# Altium PCB motor_drive.PcbDoc
Units mil, origin at the board's own origin, x right, y up, seen from the top; angles counter-clockwise.
Board outline 4650.03 x 1220.03 mil, 2 copper layers (Top Layer, Bottom Layer); 28 components, 34 nets, 102 pads, 92 vias.
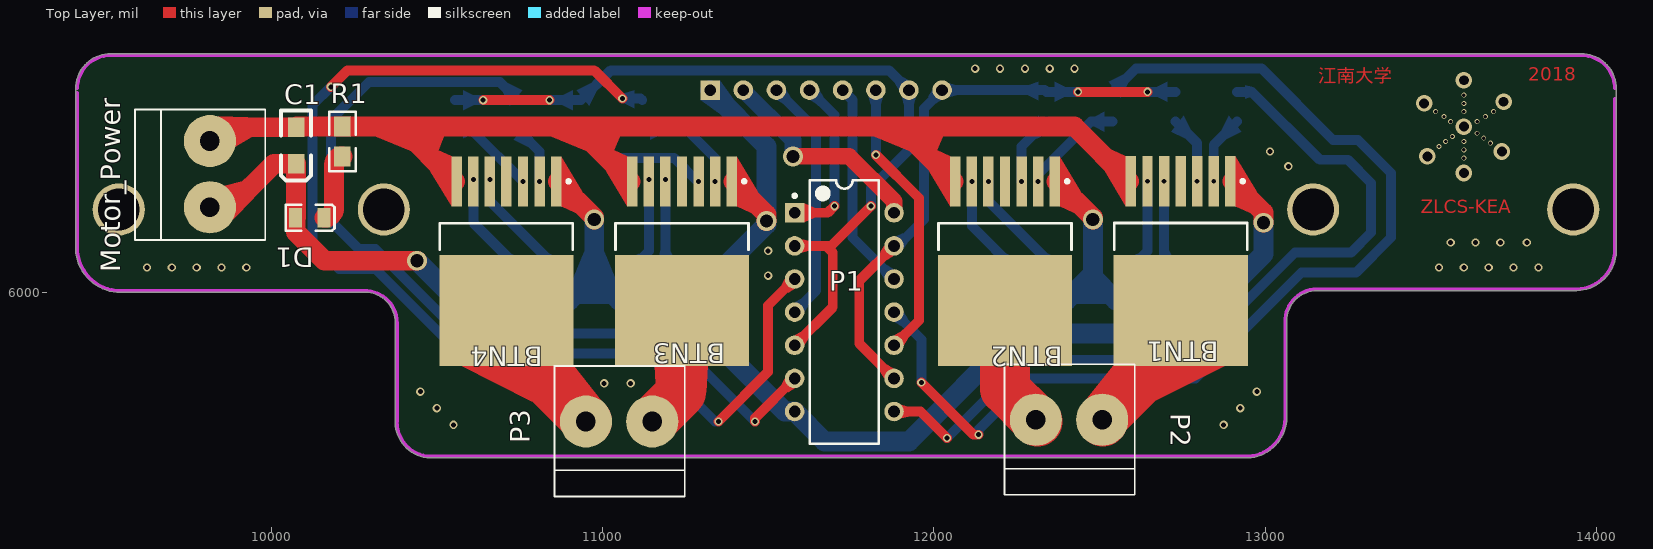
[diagram p0: Top Layer view]
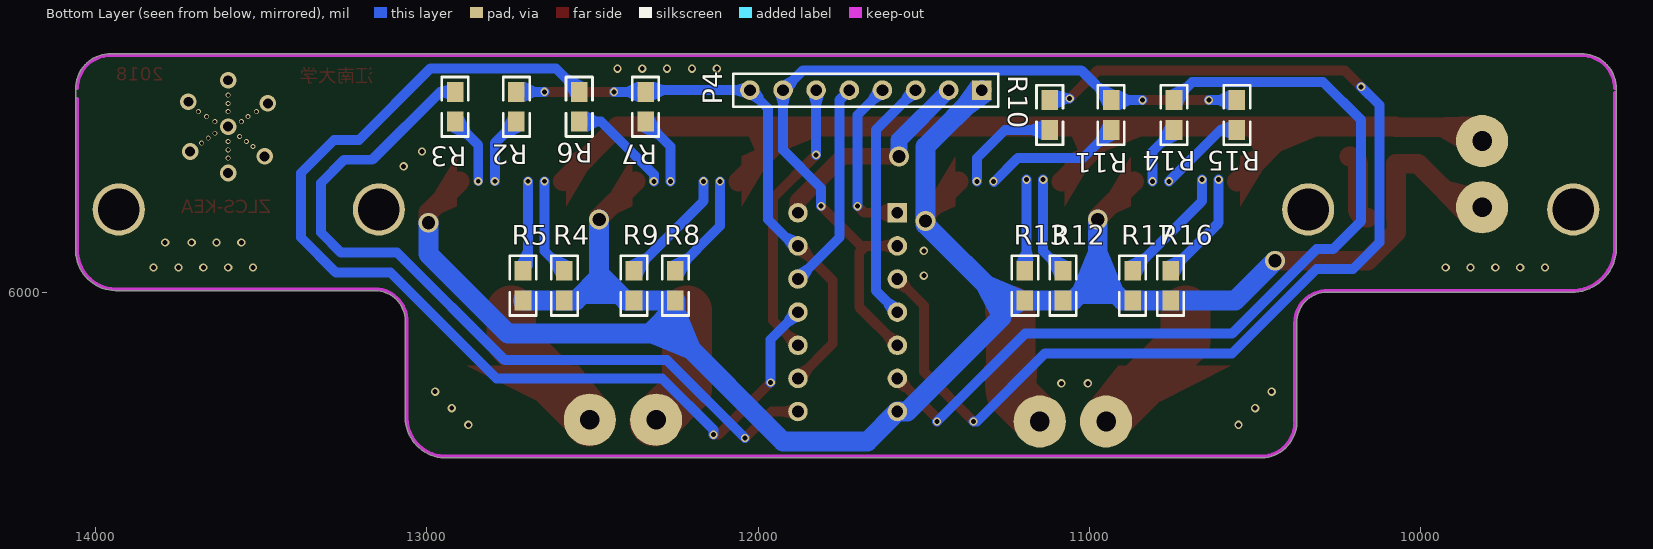
[diagram p1: Bottom Layer view, seen from below]

## Layer stack, top to bottom
Top Solder: solder mask 0.4, Solder Resist, Dk 3.5
Top Layer: signal copper 1.4
Dielectric 1: dielectric 12.6, FR-4, Dk 4.8
Bottom Layer: signal copper 1.4
Bottom Solder: solder mask 0.4, Solder Resist, Dk 3.5

## Board outline
10374.99,5625.35 10374.99,5909.93 ccw(c10282.5,5907.5) 10284.94,5999.98 9555.18,5999.98 cw(c9545,6135) 9534.7,5999.99 cw(c9545,6135) 9534.53,6000.01 cw(c9545,6135) 9410.76,6117.32 cw(c9415,6120) 9409.99,6120 9409.99,6615 cw(c9515,6615) 9515,6720.02 13955,6720.02 cw(c13955,6615) 14060.01,6615 14060.01,6115 cw(c14055,6115) 14059.33,6112.47 cw(c13937.5,6127.5) 13929.84,6004.98 13155.06,6004.98 cw(c13157.5,5912.5) 13155.13,6004.99 13155.06,6004.98 ccw(c13157.5,5912.5) 13065.01,5914.92 13065.01,5630.16 cw(c12942.5,5622.5) 13065.25,5622.5 cw(c12942.5,5622.5) 12957.53,5500.67 cw(c12955,5505) 12955,5499.98 10470,5499.98 cw(c10470,5505) 10469.25,5500.04 cw(c10485,5610)

## Design rules (kind name [scope] priority, off if disabled: settings)
Clearance [All] p1: gap=10 ignorepadtopadclearanceinfootprint=FALSE except(0: Arc-Hole Track-Hole SMDPad-Hole THPad-Hole Via-Hole Fill-Hole Poly-Hole Region-Hole Text-Hole)
PolygonConnect [All] p1: connectstyle=Relief reliefconductorwidth=10 reliefentries=4 polygonreliefangle="90 Angle" airgapwidth=10
RoutingVias [All] p1: holewidth=28 width=50 viastyle="Through Hole" minholewidth=28 minwidth=50 maxholewidth=28 maxwidth=50
SolderMaskExpansion [All] p1: expansion=4
Width Width_7 [InNet('NetD1_1')] p1: maxlimit=100 minlimit=10 preferedwidth=60
Width Width_6 [InNet('NetBTN4_8')] p2: maxlimit=300 minlimit=10 preferedwidth=150
Width Width_5 [InNet('NetBTN3_8')] p3: maxlimit=300 minlimit=10 preferedwidth=150
Width Width_4 [InNet('NetBTN2_8')] p4: maxlimit=300 minlimit=10 preferedwidth=150
Width Width_8 [InNet('NetBTN1_8')] p5: maxlimit=300 minlimit=10 preferedwidth=150
Width Width_3 [InNet('5V-SEN')] p6: maxlimit=60 minlimit=10 preferedwidth=50
Width Width_2 [InNet('VCC-7.2V')] p7: maxlimit=60 minlimit=10 preferedwidth=60
Width Width_1 [InNet('GND')] p8: maxlimit=60 minlimit=10 preferedwidth=60
Width [All] p9: maxlimit=60 minlimit=10 preferedwidth=30
30 further rules are at their usual default settings.

## Components (designator, comment, footprint, x,y, rotation, side; value= is the part's Value field where it differs from the comment)
BTN1 "BTN7971B" TO-263-7 12745,6095 r270 top
BTN2 "BTN7971B" TO-263-7 12215,6094.61 r270 top
BTN3 "BTN7971B" TO-263-7 11240,6094.61 r270 top
BTN4 "BTN7971B" TO-263-7 10710,6094.61 r270 top
C1 "Cap" 3216 10075,6498 r270 top value=0.47uF
D1 "LED3" C-0805 10160,6225 r180 top
Motor_Power "供电接口" P_Header 9815,6356.54 r90 top
P1 "74LS08" DIP-14 11730,5940 r0 top
P2 "Header 2" P_Header 12408.15,5615 r180 top
P3 "Header 2" P_Header 11050,5610 r180 top
P4 "Header 8" HDR1X8 11325,6610 r0 bottom
R1 "Res2" 0805 10215,6410 r90 top value=2K
R2 "Res2" 0805 12730,6605 r270 bottom value=10K
R3 "Res2" 0805 12915,6605 r270 bottom value=10K
R4 "Res2" 0805 12585,5975 r90 bottom value=1K
R5 "Res2" 0805 12710,5975 r90 bottom value=1K
R6 "Res2" 0805 12540,6605 r270 bottom value=10K
R7 "Res2" 0805 12340,6605 r270 bottom value=10K
R8 "Res2" 0805 12250,5975 r90 bottom value=1K
R9 "Res2" 0805 12375,5975 r90 bottom value=1K
R10 "Res2" 0805 11120,6580 r270 bottom value=10K
R11 "Res2" 0805 10935,6580 r270 bottom value=10K
R12 "Res2" 0805 11080,5975 r90 bottom value=1K
R13 "Res2" 0805 11195,5975 r90 bottom value=1K
R14 "Res2" 0805 10745,6580 r270 bottom value=10K
R15 "Res2" 0805 10555,6580 r270 bottom value=10K
R16 "Res2" 0805 10755,5975 r90 bottom value=1K
R17 "Res2" 0805 10870,5975 r90 bottom value=1K

## Footprints (in the part's own frame and the unit in brackets; to place one, negate y for a bottom-side part, rotate by r counter-clockwise, add the part's x,y. Pads: shape width x height; smd on the part's side, far side on the other; paste and mask are expansions set on the pad)
0805 [mil]
  rect 60x50 smd: 1(0,0) 2(90,0)
  silkscreen extent -45,-40 135,40
3216 [mil]
  rect 60x50 smd: 1(110,0) 2(0,0)
  silkscreen extent -50,-45 160,45
C-0805 [mm]
  rect 1x1.5 smd: 1(0,0) 2(2.184,0)
  silkscreen extent -0.79,-0.99 2.96,0.99
DIP-14 [mm] "DIP; 14 Leads; Row Spacing 7.62 mm; Pitch 2.54 mm"
  rect 1.5x1.5 hole 0.9: 1(-3.81,7.62)
  round 1.5 hole 0.9: 2(-3.81,5.08) 3(-3.81,2.54) 4(-3.81,0) 5(-3.81,-2.54) 6(-3.81,-5.08) 7(-3.81,-7.62) 8(3.81,-7.62) 9(3.81,-5.08) 10(3.81,-2.54) 11(3.81,0) 12(3.81,2.54) 13(3.81,5.08) 14(3.81,7.62)
  silkscreen extent -3.93,-10.1 2.65,10.1, body extent -3.6,-10.1 3.6,10.1, height 5.08
HDR1X8 [mm] "Connector; Header; 8 Position"
  rect 1.5x1.5 hole 0.9: 1(0,0)
  round 1.5 hole 0.9: 2(2.54,0) 3(5.08,0) 4(7.62,0) 5(10.16,0) 6(12.7,0) 7(15.24,0) 8(17.78,0)
  silkscreen extent -1.27,-1.27 19.05,1.27
P_Header [mm]
  round 4 hole 1.5: 1(-2.54,0) 2(2.54,0)
  silkscreen extent -5.05,-4.25 4.95,5.75
TO-263-7 [mm] "for BTN7971"
  rect 3.85x0.8 smd: 1(-6.1,3.81) 2(-6.1,2.54) 3(-6.1,1.27) 4(-6.1,0) 5(-6.1,-1.27) 6(-6.1,-2.54) 7(-6.1,-3.81)
  rect 8.5x10.3 smd: 8(3.8,0)
  silkscreen extent -6.22,-5.1 -0.85,5.1, body extent -2.9,-5.1 6.55,5.1, height 4.4

## Part data
BTN1 BTN2 BTN3 BTN4 P1 P2 P3: library part Component_1
C1: "Capacitor", LatestRevisionDate=17-Jul-2002, LatestRevisionNote="Re-released for DXP Platform.", PackageDescription="Radial Cap, Thru-Hole; 2 Leads; 0.3 in Pin Spacing", PackageReference=C-3216, Published=8-Jun-2000, Publisher="Altium Limited"
D1: "Typical BLUE SiC LED", PackageDocument=16-Apr-2002, DatasheetDocument=16-Apr-2002, LatestRevisionDate=17-Dec-2003, LatestRevisionNote="PCB Footprint replaced.", PackageReference=3.5X2.8X1.9, Published=8-Jun-2000, Publisher="Altium Limited"
Motor_Power: library part "Header 2", "Header, 2-Pin", LatestRevisionDate=17-Jul-2002, LatestRevisionNote="Re-released for DXP Platform.", Publisher="Altium Limited"
P4: "Header, 8-Pin", LatestRevisionDate=17-Jul-2002, LatestRevisionNote="Re-released for DXP Platform.", Publisher="Altium Limited"
R1 R2 R3 R4 R5 R6 R7 R8 R9 R10 R11 R12 R13 R14 R15 R16 R17: "Resistor", LatestRevisionDate=17-Jul-2002, LatestRevisionNote="Re-released for DXP Platform.", PackageReference=AXIAL-0.4, Published=8-Jun-2000, Publisher="Altium Limited"
  R2 R3 R4 R5 R6 R7 R8 R9 R10 R11 R12 R13 R14 R15 R16 R17: PackageDescription="Axial Device, Thru-Hole; 2 Leads; 0.4 in Pin Spacing"

## Free pads (board coordinates)
  round 157.48 hole 125.98: 0(9540,6250) 0(10340,6250) 0(13145,6250) 0(13930,6250)

## Via types
v1: diameter 25, hole 15, Top Layer to Bottom Layer, 61 vias
v2: diameter 15, hole 10, Top Layer to Bottom Layer, 18 vias
v3: diameter 50, hole 30, Top Layer to Bottom Layer, 7 vias
v4: diameter 60, hole 40, Top Layer to Bottom Layer, 6 vias

## Nets (pads, with @x,y where several pads share a name; then routed paths per layer and width w, separated by ;. In a path a pad name is that pad's centre, name@x,y a point inside that pad or via, vN(x,y) a via of type N, cw(c..) or ccw(c..) an arc to the next point about the centre after c; other vN are vias at no path point)
5V-SEN: P1.14 P4.2 | length 658.1
  Top Layer w50: v4(11575,6410) 11745,6410 11880,6275 P1.14
  Bottom Layer w50: P4.2 11575,6460 v4(11575,6410)
EN_motorL: P1.9 P1.13 P4.8 R2.1 R7.1 | length 1720
  Top Layer w30: P1.9 11775,5845 11775,6035 P1.13 ; v1(12435,6605) v1(12645,6605)
  Bottom Layer w30: P1.13@11890,6140 11970,6220 11970,6555 P4.8 12335,6610 R7.1 v1(12435,6605) ; v1(12645,6605) R2.1
EN_motorR: P1.2 P1.5 P4.7 R11.1 R15.1 | length 2465.4
  Top Layer w30: v1(10640,6580) v1(10840,6580) ; P1.5 11695,5955 11695,6120 11675,6140 ; P1.2 11675,6140 ; v1(11810,6260) 11690,6140 11675,6140
  Bottom Layer w30: R15.1 v1(10640,6580) ; v1(10840,6580) R11.1 11025,6670 11865,6670 P4.7 11925,6430 11810,6315 v1(11810,6260)
GND: BTN1.1 BTN2.1 BTN3.1 BTN4.1 C1.1 D1.2 Motor_Power.1 P1.7 P4.1 R4.1 R5.1 R8.1 R9.1 R12.1 R13.1 R16.1 R17.1 | length 6540.5
  Top Layer w60: Motor_Power.1@9826.54,6245 Motor_Power.1 9876.54,6256.54 10008,6388 C1.1 10075,6226 D1.2 10074,6181.79 10160.79,6095 v4(10440,6095) ; BTN4.1@10865.75,6334.76 10975,6225.51 v4(10975,6220) ; BTN3.1@11395.75,6334.76 11395.75,6334.25 11495,6235 v4(11495,6215) ; BTN2.1@12370.75,6334.76 12480,6225.51 v4(12480,6220) ; BTN1.1@12900.75,6335.16 12995,6240.91 v4(12995,6210)
  Bottom Layer w60: v4(10440,6095) 10560,5975 R16.1 R17.1 10900,5975 10975,6050 ; v4(10975,6220) 10975,6050 ; R13.1@11185,5975 R12.1 11050,5975 10975,6050 ; R13.1 11265,5975 ; P4.1 11495,6440 v4(11495,6215) 11495,6205 11265,5975 ; v4(12480,6220) 12480,6055 12475,6050 ; R5.1 R4.1 12550,5975 12475,6050 ; v4(12995,6210) 12995,6115 12755,5875 12250,5875 ; 11265,5975 11265,5925 11550,5640 P1.7 11670,5550 11925,5550 12250,5875 ; 12250,5875 R8.1 R9.1 12400,5975 12475,6050
NetBTN1_2: BTN1.2 R3.2 | length 208.8
  Bottom Layer w30: v1(12845,6335.16) 12845,6445 R3.2
NetBTN1_3: BTN1.3 R2.2 | length 206.8
  Bottom Layer w30: R2.2 12795,6450 v1(12795,6335.16)
NetBTN1_5: BTN1.5 R5.2 | length 276.4
  Bottom Layer w30: v1(12695,6335.16) 12695,6080 R5.2
NetBTN1_6: BTN1.6 R4.2 | length 295
  Bottom Layer w30: R4.2 12645,6125 v1(12645,6335.16)
NetBTN1_8: BTN1.8 P2.1 | length 432.7
  Top Layer w150: P2.1@12510,5610 12510,5620 12745,5855 BTN1.8
NetBTN2_2: BTN2.2 R6.2 | length 311.5
  Bottom Layer w30: v1(12315,6334.76) 12315,6355 12475,6515 R6.2
NetBTN2_3: BTN2.3 R7.2 | length 211.3
  Bottom Layer w30: v1(12265,6334.76) 12265,6440 R7.2
NetBTN2_5: BTN2.5 R9.2 | length 356.7
  Bottom Layer w30: v1(12165,6334.76) 12165,6275 R9.2
NetBTN2_6: BTN2.6 R8.2 | length 325.7
  Bottom Layer w30: v1(12115,6334.76) 12115,6200 R8.2
NetBTN2_8: BTN2.8 P2.2 | length 375.7
  Top Layer w150: BTN2.8 12215,5708.15 P2.2 P2.2@12313.15,5610
NetBTN3_2: BTN3.2 R10.2 | length 325.2
  Bottom Layer w30: R10.2 11255,6490 11340,6405 v1(11340,6335)
NetBTN3_3: BTN3.3 R11.2 | length 418.2
  Bottom Layer w30: R11.2 11020,6405 11216.46,6405 v1@11288.23,6333.23
  other v1: 11290,6335
NetBTN3_5: BTN3.5 R13.2 | length 277.1
  Bottom Layer w30: v1(11190,6340) 11190,6070 R13.2
NetBTN3_6: BTN3.6 R12.2 | length 299.9
  Bottom Layer w30: R12.2 11140,6125 v1(11140,6340)
NetBTN3_8: BTN3.8 P3.1 | length 372.5
  Top Layer w150: P3.1 11237.77,5697.77 11237.5,5698.05 11237.5,5942.5 BTN3.8
NetBTN4_2: BTN4.2 R14.2 | length 181.9
  Bottom Layer w30: R14.2 10810,6425 v1(10810,6335)
NetBTN4_3: BTN4.3 R15.2 | length 269.2
  Bottom Layer w30: R15.2 10605,6490 v1(10760,6335)
NetBTN4_5: BTN4.5 R17.2 | length 362
  Bottom Layer w30: v1(10660,6340) 10660,6275 R17.2
NetBTN4_6: BTN4.6 R16.2 | length 335.1
  Bottom Layer w30: v1(10610,6340) 10610,6210 R16.2
NetBTN4_8: BTN4.8 P3.2 | length 435.7
  Top Layer w150: BTN4.8 10710,5853.15 P3.2@10953.15,5610
NetD1_1: D1.1 R1.1 | length 216.4
  Top Layer w60: D1.1 ccw(c10160,6255) 10190,6255 10190,6385 cw(c10215,6385) R1.1
PWM1: P1.10 P4.6 | length 854.9
  Top Layer w30: v1(11825,6415) 11955,6285 11955,5915 P1.10
  Bottom Layer w30: v1(11825,6415) P4.6
PWM2: P1.12 P4.5 | length 634.2
  Bottom Layer w30: P4.5 11755,6580 11755,6165 P1.12
PWM3: P1.1 P4.4 | length 509.4
  Top Layer w30: P1.1 11680,6240 v1(11700,6260)
  Bottom Layer w30: P4.4 11700,6535 v1(11700,6260)
PWM4: P1.4 P4.3 | length 746.6
  Bottom Layer w30: P4.3 11645,6490 11645,6005 P1.4
PWM_OUT1: P1.8 R3.1 | length 2398.9
  Top Layer w30: P1.8 11960,5640 v1(12040,5560)
  Bottom Layer w30: v1(12040,5560) 12275,5795 12765,5795 13090,6120 13260,6120 13320,6180 13320,6330 13250,6400 13165,6400 12960,6605 R3.1
PWM_OUT2: P1.11 R6.1 | length 3179.1
  Top Layer w30: v1(11962.5,5727.5) 12120,5570 v1(12135,5570)
  Bottom Layer w30: P1.11 11962.5,5857.5 v1(11962.5,5727.5) ; v1(12135,5570) 12135,5585 12290,5740 12790,5740 13110,6060 13275,6060 13380,6165 13380,6360 13280,6460 13205,6460 12990,6675 12610,6675 R6.1
PWM_OUT3: P1.3 R10.1 | length 3464.7
  Top Layer w30: v1(10180,6620) 10230,6670 10975,6670 v1(11060,6585) ; v1(11350,5610) 11500,5760 11500,5960 P1.3
  Bottom Layer w30: v1(10180,6620) 10125,6565 10125,6150 10205,6070 10315,6070 10570,5815 11135,5815 11340,5610 v1(11350,5610) ; v1(11060,6585) 11115,6585 R10.1
PWM_OUT4: P1.6 R14.1 | length 2650.7
  Top Layer w30: v1(11460,5610) 11460,5620 P1.6
  Bottom Layer w30: R14.1 10690,6635 10295,6635 10180,6520 10180,6215 10265,6130 10315,6130 10570,5875 11195,5875 v1(11460,5610)
VCC-7.2V: BTN1.7 BTN2.7 BTN3.7 BTN4.7 C1.2 Motor_Power.2 R1.2 | length 3568.4
  Top Layer w60: Motor_Power.2 cw(c9856.46,6456.54) 9856.46,6498 C1.2 cw(c10077,6498) 10077,6500 R1.2 10389.02,6500 ; BTN4.7@10554.25,6334.76 10389.02,6500 ; BTN3.7@11084.25,6334.76 10919.02,6500 ; BTN2.7@12059.25,6334.76 11894.02,6500 ; BTN1.7@12589.25,6335.16 12424.41,6500 11894.02,6500 ; 10389.02,6500 10919.02,6500 ; 10919.02,6500 11894.02,6500
pads on no net: BTN1.4 BTN2.4 BTN3.4 BTN4.4
copper on no net:
  other v1: 10550,5600 12875,5600 10500,5650 12925,5650 10450,5700 12975,5700 11005,5725 11085,5725 11500,6050 9625,6075 9700,6075 9775,6075 9850,6075 9925,6075 13525,6075 13600,6075 13675,6075 13750,6075 13825,6075 11500,6125 13560,6150 13635,6150 13710,6150 13790,6150 13070,6380 13015,6425 12125,6675 12200,6675 12275,6675 12350,6675 12425,6675
  other v2: 13600,6405 13600,6430 13525,6440 13680,6450 13545,6455 13600,6455 13660,6465 13565,6470 13640,6480 13560,6515 13640,6515 13540,6530 13665,6530 13515,6545 13600,6545 13690,6545 13600,6570 13600,6595
  other v3: 13600,6360 13490,6410 13715,6425 13600,6500 13480,6570 13720,6575 13600,6640

## Keep-outs
Keep-Out Layer:
  lines w10: 9415,6120 9415,6602.56 ; 9415,6125 ccw(c9545,6135) 9555,6005 ; 9415,6615 cw(c9515,6615) 9515,6715 11965,6715 13955,6715 cw(c13955,6615) 14055,6615 ; 9550,6005 10285,6005 ; 10280,6005 cw(c10282.5,5907.5) 10380,5910 10380,5609.39 ; 10379.47,5609.39 ccw(c10484.3,5609.39) 10469.47,5505.61 ; 10470,5505 12955,5505 ; 12950,5505 ccw(c12942.5,5622.5) 13060,5630 ; 13060,5625 13060,5910 cw(c13157.5,5912.5) 13155,6010 ; 13145,6010 13930,6010 ccw(c13937.5,6127.5) 14055,6120 ; 14055,6115 14055,6585

## Other copper
Top Layer:
  text "2018" at 13795,6625 h70
  text "江南大学" at 13160,6620 h70
  text "ZLCS-KEA" at 13470,6225 h70

## Silkscreen, mask and mechanical layers (free items; w line width, h text height)
Mechanical 1:
  lines w10: 9415,6595 9415,6615 ; 10469.39,5505.09 10470,5505
Mechanical 13:
  lines w10: 14055,6585 14055,6615